# Altium PCB stm32 light weight1-22cm-P1.PcbDoc
Units mm, origin at the board's own origin, x right, y up, seen from the top; angles counter-clockwise.
Board outline 215 x 206.27 mm, 2 copper layers (Top Layer, Bottom Layer); 123 components, 92 nets, 493 pads, 5 vias.
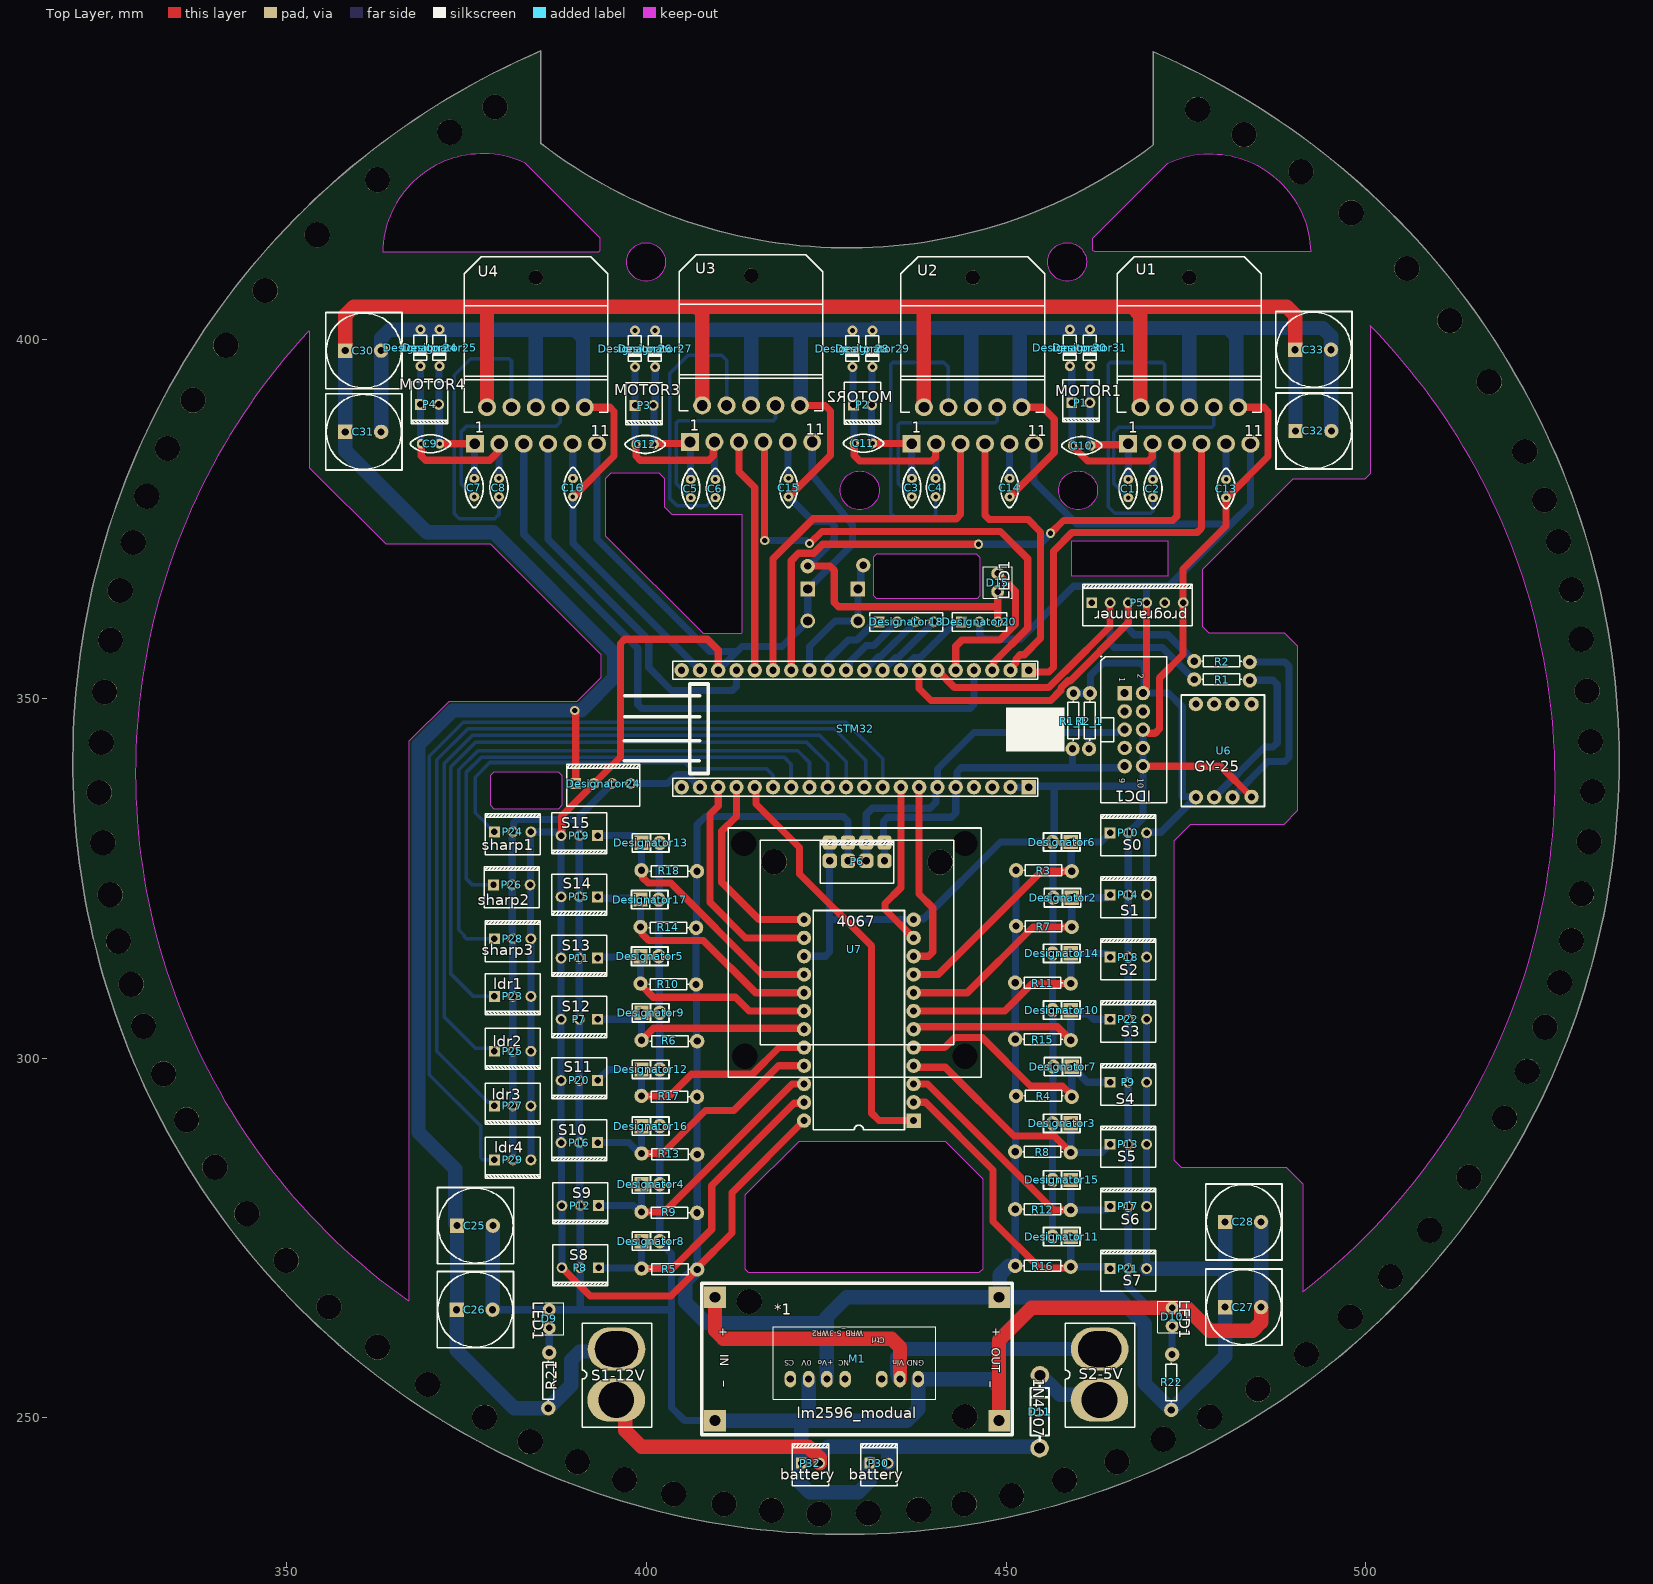
[diagram p0: Top Layer view]
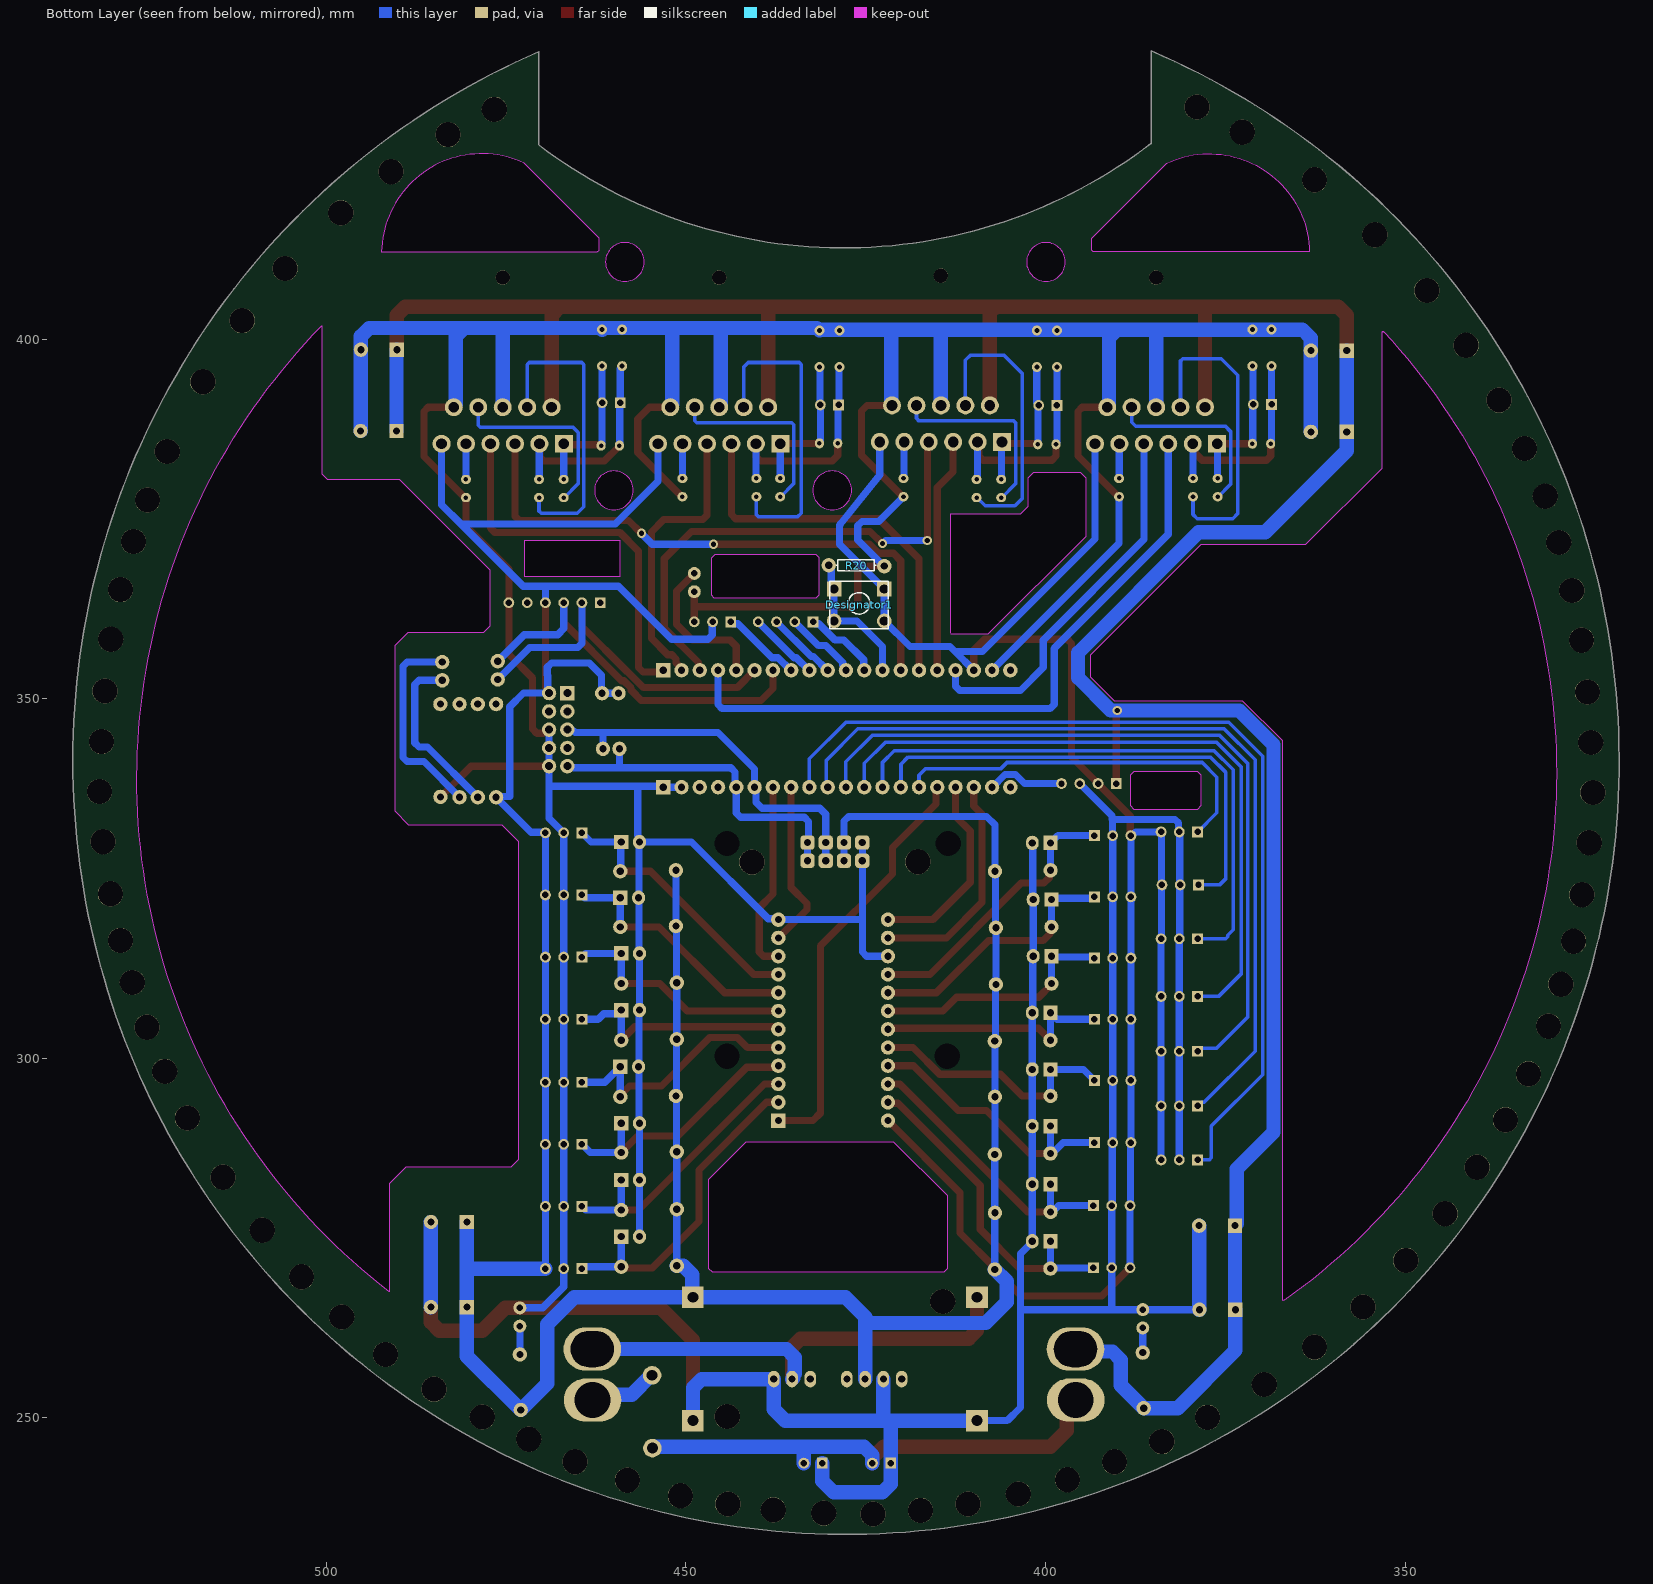
[diagram p1: Bottom Layer view, seen from below]

## Layer stack, top to bottom
Top Solder: solder mask 0.0102, Solder Resist, Dk 3.5
Top Layer: signal copper 0.0356
Dielectric 1: dielectric 0.32, FR-4, Dk 4.8
Bottom Layer: signal copper 0.0356
Bottom Solder: solder mask 0.0102, Solder Resist, Dk 3.5

## Board outline
385.292,440.075 ccw(c427.727,341.305) 470.451,439.951 470.42,439.92 470.42,426.99 470.438,426.99 cw(c428.02,482.674) 385.292,427.228
cut-out: 473.329,285.877 474.345,284.861 488.95,284.861 491.236,282.575 491.236,267.589 491.24,267.568 ccw(c436.32,338.869) 500.634,401.828 500.634,381.254 499.872,380.492 489.839,380.492 477.266,367.919 477.266,360.045 478.155,359.156 488.696,359.156 490.474,357.378 490.474,334.391 488.569,332.486 475.615,332.486 473.329,330.2
cut-out: 459.994,376.268 cw(c459.994,378.968) 457.294,378.968 cw(c459.994,378.968) 459.994,381.668 cw(c459.994,378.968) 462.694,378.968 cw(c459.994,378.968)
cut-out: 429.641,376.268 cw(c429.641,378.968) 426.941,378.968 cw(c429.641,378.968) 429.641,381.668 cw(c429.641,378.968) 432.341,378.968 cw(c429.641,378.968)
cut-out: 458.47,408.018 cw(c458.47,410.718) 455.77,410.718 cw(c458.47,410.718) 458.47,413.418 cw(c458.47,410.718) 461.17,410.718 cw(c458.47,410.718)
cut-out: 399.923,408.018 cw(c399.923,410.718) 397.223,410.718 cw(c399.923,410.718) 399.923,413.418 cw(c399.923,410.718) 402.623,410.718 cw(c399.923,410.718)
cut-out: 363.781,371.475 353.187,382.069 353.187,400.939 ccw(c353.06,400.939) 352.967,401.026 ccw(c419.062,339.752) 366.787,266.334 366.907,266.319 ccw(c366.903,266.446) 367.03,266.446 367.03,344.117 372.544,349.631 390.271,349.631 390.361,349.668 393.663,352.97 393.7,353.06 393.7,356.108 378.333,371.475
cut-out: 462.026,412.369 462.026,414.02 472.485,424.479 cw(c478.35,411.8) 492.316,412.136 492.316,412.115 462.28,412.115
cut-out: 363.283,412.136 393.319,412.115 393.573,412.369 393.573,414.02 383.114,424.479 ccw(c377.249,411.8)
cut-out: 431.546,364.363 431.927,363.982 446.024,363.982 446.405,364.363 446.405,369.57 445.897,370.078 431.927,370.078 431.546,369.697
cut-out: 394.335,372.618 394.335,380.619 395.097,381.381 401.701,381.381 402.463,380.619 402.463,376.682 403.479,375.666 413.258,375.666 413.258,359.156 413.131,359.029 407.924,359.029
cut-out: 459.105,367.03 459.105,371.983 472.44,371.983 472.44,367.03
cut-out: 378.333,335.153 378.333,339.344 378.841,339.852 387.731,339.852 388.239,339.344 388.239,335.153 387.731,334.645 378.841,334.645
cut-out: 413.639,270.764 414.147,270.256 446.278,270.256 446.786,270.764 446.786,283.21 441.579,288.417 421.132,288.417 413.639,280.924

## Design rules (kind name [scope] priority, off if disabled: settings)
Clearance [All] p1: gap=0.254 ignorepadtopadclearanceinfootprint=FALSE except(0: Arc-Hole Track-Hole SMDPad-Hole THPad-Hole Via-Hole Fill-Hole Poly-Hole Region-Hole Text-Hole)
PolygonConnect [All] p1: connectstyle=Relief reliefconductorwidth=0.254 reliefentries=4 polygonreliefangle="90 Angle" airgapwidth=0.254
RoutingVias [All] p1: holewidth=0.711 width=1.27 viastyle="Through Hole" minholewidth=0.711 minwidth=1.27 maxholewidth=0.711 maxwidth=1.27
SolderMaskExpansion [All] p1: expansion=0.102 istentingtop=FALSE
Width [All] p1: maxlimit=2 minlimit=0.5 preferedwidth=1
30 further rules are at their usual default settings.

## Classes and differential pairs
component class "stm32 light weight": *1 C1 C2 C3 C4 C5 C6 C7 C8 C25 C26 C27 C28 D11 IDC1 M1 P1 P2 P3 P4 P5 P7 P8 P9 P10 P11 P12 P13 P14 P15 P16 P17 P18 P19 P20 P21 P22 P23 P24 P25 P26 P27 P28 P30 R1 R2 R3 R4 R5 R6 R7 R8 R9 R10 R11 R12 R13 R14 R15 R16 R17 R18 S1-12V S2-5V U2 U6 U7

## Components (designator, comment, footprint, x,y, rotation, side; value= is the part's Value field where it differs from the comment)
4067 "Comment" DIP254P1080X508-24 440.944,319.278 r180 top
*1 "WRB_S-3WR2" wrb2405s 452.571,370.631 r180 top
C1 "100nF" Cap-100nF#1 460.503,385.373 r270 top
C2 "100nF" Cap-100nF#1 463.932,385.373 r270 top
C3 "100nF" Cap-100nF#1 430.404,385.5 r270 top
C4 "100nF" Cap-100nF#1 433.706,385.5 r270 top
C5 "100nF" Cap-100nF#1 399.67,385.373 r270 top
C6 "100nF" Cap-100nF#1 403.099,385.373 r270 top
C7 "100nF" Cap-100nF#1 369.571,385.5 r270 top
C8 "100nF" Cap-100nF#1 373,385.5 r270 top
C9 "100nF" Cap-100nF#2 363.8,391.921 r0 top
C10 "100nF" Cap-100nF#2 454.351,391.667 r0 top
C11 "100nF" Cap-100nF#2 423.998,391.984 r0 top
C12 "100nF" Cap-100nF#2 393.645,391.836 r0 top
C13 "100nF" Cap-100nF#1 487.044,373.071 r90 top
C14 "100nF" Cap-100nF#1 456.945,373.198 r90 top
C15 "100nF" Cap-100nF#1 426.211,373.198 r90 top
C16 "100nF" Cap-100nF#1 396.239,373.198 r90 top
C25 "10uF" "Cap electrolitic radial 10x16-5" 368.557,271.28 r0 top
C26 "10uF" "Cap electrolitic radial 10x16-5" 368.51,259.596 r0 top
C27 "10uF" "Cap electrolitic radial 10x16-5" 475.364,259.951 r0 top
C28 "10uF" "Cap electrolitic radial 10x16-5" 475.364,271.788 r0 top
C30 "10uF" "Cap electrolitic radial 10x16-5" 353.016,392.946 r0 top
C31 "10uF" "Cap electrolitic radial 10x16-5" 353.016,381.643 r0 top
C32 "10uF" "Cap electrolitic radial 10x16-5" 485.143,381.77 r0 top
C33 "10uF" "Cap electrolitic radial 10x16-5" 485.096,393.073 r0 top
D9 "LED1" led-2 386.334,263.779 r180 top
D10 "LED1" led-2 472.948,264.033 r180 top
D11 "1N4007" Diod1n4007 454.66,250.952 r90 top
D15 "LED1" led-2 448.945,366.141 r0 top (schematic designator D13)
Designator1 "Comment" "Switch - Push to On" 425.894,363.029 r180 bottom
Designator2 "Comment" "Cap electrolitic radial 5x11-2" 453.612,319.659 r0 top
Designator3 "Comment" "Cap electrolitic radial 5x11-2" 453.485,288.29 r0 top
Designator4 "Comment" "Cap electrolitic radial 5x11-2" 404.782,285.162 r180 top
Designator5 "Comment" "Cap electrolitic radial 5x11-2" 404.654,316.861 r180 top
Designator6 "Comment" "Cap electrolitic radial 5x11-2" 453.485,327.406 r0 top
Designator7 "Comment" "Cap electrolitic radial 5x11-2" 453.612,296.164 r0 top
Designator8 "Comment" "Cap electrolitic radial 5x11-2" 404.781,277.237 r180 top
Designator9 "Comment" "Cap electrolitic radial 5x11-2" 404.781,308.991 r180 top
Designator10 "Comment" "Cap electrolitic radial 5x11-2" 453.485,304.034 r0 top
Designator11 "Comment" "Cap electrolitic radial 5x11-2" 453.485,272.538 r0 top
Designator12 "Comment" "Cap electrolitic radial 5x11-2" 404.781,301.113 r180 top
Designator13 "Comment" "Cap electrolitic radial 5x11-2" 404.781,332.613 r180 top
Designator14 "Comment" "Cap electrolitic radial 5x11-2" 453.485,311.912 r0 top
Designator15 "Comment" "Cap electrolitic radial 5x11-2" 453.485,280.416 r0 top
Designator16 "Comment" "Cap electrolitic radial 5x11-2" 404.781,293.239 r180 top
Designator17 "Comment" "Cap electrolitic radial 5x11-2" 404.654,324.739 r180 top
Designator18 "Comment" HDR1X4 432.308,360.68 r0 top
Designator20 "Comment" HDR1X3#1 443.738,360.68 r0 top
Designator24 "Comment" HDR1X4 390.144,338.201 r0 top
Designator24 "Comment" "Diode 1n4148" 368.554,401.32 r270 top
Designator25 "Comment" "Diode 1n4148" 371.221,401.32 r270 top
Designator26 "Comment" "Diode 1n4148" 398.399,401.193 r270 top
Designator27 "Comment" "Diode 1n4148" 401.193,401.193 r270 top
Designator28 "Comment" "Diode 1n4148" 428.625,401.193 r270 top
Designator29 "Comment" "Diode 1n4148" 431.419,401.193 r270 top
Designator30 "Comment" "Diode 1n4148" 458.851,401.32 r270 top
Designator31 "Comment" "Diode 1n4148" 461.645,401.32 r270 top
IDC1 "CONNECTOR_IDC_5X2" "IDC2.54-10PIN WITH CABLE" 467.741,345.694 r270 top
M1 "lm2596_modual" LM2596_modual 389.382,134.62 r0 top
P1 "MOTOR1" HDR1X2 459.105,391.16 r0 top
P2 "MOTOR2" HDR1X2 428.752,390.842 r0 top
P3 "MOTOR3" HDR1X2 398.399,390.779 r0 top
P4 "MOTOR4" HDR1X2 368.554,390.906 r0 top
P5 "programmer" HDR1X6 461.899,363.347 r0 top
P6 "OLED" OLED 516.636,295.021 r0 top
P7 "S12" HDR1X3#2 393.192,305.435 r180 top
P8 "S8" HDR1X3#2 393.319,270.891 r180 top
P9 "S4" HDR1X3#2 464.438,296.662 r0 top
P10 "S0" HDR1X3#2 464.438,331.333 r0 top
P11 "S13" HDR1X3#2 393.192,313.944 r180 top
P12 "S9" HDR1X3#2 393.319,279.527 r180 top
P13 "S5" HDR1X3#2 464.438,288.026 r0 top
P14 "S1" HDR1X3#2 464.438,322.697 r0 top
P15 "S14" HDR1X3#2 393.192,322.453 r180 top
P16 "S10" HDR1X3#2 393.192,288.29 r180 top
P17 "S6" HDR1X3#2 464.438,279.39 r0 top
P18 "S2" HDR1X3#2 464.438,314.061 r0 top
P19 "S15" HDR1X3#2 393.193,330.972 r180 top
P20 "S11" HDR1X3#2 393.192,296.926 r180 top
P21 "S7" HDR1X3#2 464.438,270.754 r0 top
P22 "S3" HDR1X3#2 464.438,305.425 r0 top
P23 "ldr1" HDR1X3#3 378.841,308.61 r0 top
P24 "sharp1" HDR1X3#2 378.84,331.46 r0 top
P25 "ldr2" HDR1X3#3 378.84,301 r0 top
P26 "sharp2" HDR1X3#2 378.713,324.094 r0 top
P27 "ldr3" HDR1X3#3 378.84,293.38 r0 top
P28 "sharp3" HDR1X3#2 378.84,316.601 r0 top
P29 "ldr4" HDR1X3#3 378.841,285.877 r0 top
P30 "battery" HDR1X2 431.038,243.713 r0 top
P32 "battery" HDR1X2 421.513,243.713 r0 top
R1 "Resistor" resistor 480.06,352.679 r0 top
R1_1 "Resistor" resistor 459.359,346.837 r270 top (schematic designator R1)
R2 "Resistor" resistor 480.06,355.219 r0 top
R2_1 "Resistor" resistor 461.645,346.837 r270 top (schematic designator R2)
R3 "Resistor" resistor 455.295,326.136 r0 top
R4 "Resistor" resistor 455.295,294.767 r0 top
R5 "Resistor" resistor 403.119,270.633 r180 top
R6 "Resistor" resistor 403.119,302.383 r180 top
R7 "Resistor" resistor 455.295,318.389 r0 top
R8 "Resistor" resistor 455.168,287.02 r0 top
R9 "Resistor" resistor 403.098,278.511 r180 top
R10 "Resistor" resistor 402.971,310.261 r180 top
R11 "Resistor" resistor 455.168,310.515 r0 top
R12 "Resistor" resistor 455.168,279.019 r0 top
R13 "Resistor" resistor 403.119,286.635 r180 top
R14 "Resistor" resistor 402.971,318.135 r180 top
R15 "Resistor" resistor 455.168,302.641 r0 top
R16 "Resistor" resistor 455.168,271.145 r0 top
R17 "Resistor" resistor 403.098,294.64 r180 top
R18 "Resistor" resistor 403.098,326.009 r180 top
R20 "Resistor" resistor 426.212,368.554 r180 bottom
R21 "Resistor" resistor 386.334,255.27 r90 top
R22 "Resistor" resistor 472.948,255.016 r90 top
S1-12V "SWITCH SPDT2PIN" "Switch SPDT2PIN" 395.605,256.032 r0 top
S2-5V "SWITCH SPDT2PIN" "Switch SPDT2PIN" 462.788,256.032 r0 top
STM32 "Comment" STM32 429.057,345.583 r0 top
U1 "L6203" Multiwatt11 475.459,387.985 r0 top
U2 "L6203" Multiwatt11 445.36,387.985 r0 top
U3 "L6203" Multiwatt11 414.528,388.239 r0 top (schematic designator U2)
U4 "L6203" Multiwatt11 384.614,387.985 r0 top
U6 "GY-25" GY-25 480.187,342.773 r90 top
U7 "OLED-BIG" OLED-BIG 428.879,314.96 r0 top

## Footprints (in the part's own frame and the unit in brackets; to place one, negate y for a bottom-side part, rotate by r counter-clockwise, add the part's x,y. Pads: shape width x height; smd on the part's side, far side on the other; paste and mask are expansions set on the pad)
"Cap electrolitic radial 5x11-2" [mm]
  rect 2x2 hole 1: 1(5.493,2.667)
  oval 1.8x2 hole 1: 2(2.953,2.667)
  silkscreen extent 1.68,1.4 6.76,3.94, body extent 1.82,0.04 6.82,5.04, height 11.3
"Cap electrolitic radial 10x16-5" [mm]
  rect 2x2 hole 1: 1(5.077,5.453)
  round 2 hole 1: 2(10.077,5.453)
  silkscreen extent 2.38,0.15 12.98,10.75, body extent 2.58,0.46 12.58,10.45, height 16
Cap-100nF#1 [mil]
  oval 50x55 hole 25: 1(192.17,254.96) 2(292.17,254.96)
  silkscreen extent 133,206 352,304, body extent 127,221 357,288, height 272
Cap-100nF#2 [mil]
  oval 50x55 hole 25: 1(192.17,-254.96) 2(292.17,-254.96)
  silkscreen extent 133,-304 352,-206, body extent 127,-288 357,-221, height 272
Diod1n4007 [mm]
  round 2.575 hole 1.5: 1(4.97,-0.03)
  round 2.575 hole 1.52: 2(-5.16,0.01)
  silkscreen extent -4.17,-1.28 3.96,1.26, body extent -5.86,-2.32 5.74,2.33, height 1.59
"Diode 1n4148" [mil]
  round 55 hole 27: 1(0,0) 2(200,0)
  silkscreen extent 30,-36 168,34, body extent -7,-32 210,33, height 71
DIP254P1080X508-24 [mm]
  round 2 hole 1: 97(19.05,22.86) 98(19.05,25.4) 99(3.81,25.4) 100(3.81,22.86) 101(3.81,20.32) 102(3.81,17.78) 103(3.81,15.24) 104(3.81,12.7) 105(3.81,10.16) 106(19.05,7.62) 107(19.05,10.16) 108(19.05,12.7) 109(19.05,15.24) 110(19.05,17.78) 111(19.05,20.32) 112(3.81,7.62) 113(3.81,0) 114(19.05,27.94) 115(19.05,5.08) 116(3.81,5.08) 118(3.81,2.54) 119(19.05,2.54) 120(19.05,0)
  rect 2x2 hole 1: 117(3.81,27.94)
  silkscreen extent 5.08,-1.27 17.78,29.21, body extent 3.68,-1.9 19.18,29.84, height 5.08
GY-25 [mm]
  round 2 hole 1: 1(-6.477,3.81) 2(-6.477,1.27) 3(-6.477,-1.27) 4(-6.43,-3.93) 5(6.477,3.81) 6(6.477,1.27) 7(6.477,-1.27) 8(6.477,-3.937)
  silkscreen extent -7.75,-5.72 7.75,5.84, body extent -7.75,-5.92 7.76,5.67, height 1.76
HDR1X2 [mm] "Connector; Header; 2 Position"
  rect 1.5x1.5 hole 0.9: 1(0,0)
  round 1.5 hole 0.9: 2(2.54,0)
  silkscreen extent -1.27,-2.67 3.81,3.17, body extent -1.27,-3.2 3.81,2.6, height 11.51
HDR1X3#1 [mm] "Connector; Header; 3 Position"
  rect 1.5x1.5 hole 0.9: 1(0,0)
  round 1.5 hole 0.9: 2(2.54,0) 3(5.08,0)
  silkscreen extent -1.27,-1.27 6.35,1.27, body extent -1.26,-1.27 6.36,1.27, height 8.38
HDR1X3#2 [mm] "Connector; Header; 3 Position"
  rect 1.5x1.5 hole 0.9: 1(0.001,0.01)
  round 1.5 hole 0.9: 2(2.541,0.01) 3(5.081,0.01)
  silkscreen extent -1.27,-3.17 6.35,2.55, body extent -1.27,-3.19 6.35,2.61, height 11.51
HDR1X3#3 [mm] "Connector; Header; 3 Position"
  rect 1.5x1.5 hole 0.9: 1(0.001,-0.01)
  round 1.5 hole 0.9: 2(2.541,-0.01) 3(5.081,-0.01)
  silkscreen extent -1.27,-2.55 6.35,3.17, body extent -1.27,-2.61 6.35,3.19, height 11.51
HDR1X4 [mm] "Connector; Header; 4 Position"
  rect 1.5x1.5 hole 0.9: 1(0,0)
  round 1.5 hole 0.9: 2(2.54,0) 3(5.08,0) 4(7.62,0)
  silkscreen extent -1.27,-1.27 8.89,1.27, body extent -1.27,-1.28 8.89,1.26, height 8.38
HDR1X6 [mm] "Connector; Header; 6 Position"
  rect 1.5x1.5 hole 0.9: 1(0,0)
  round 1.5 hole 0.9: 2(2.54,0) 3(5.08,0) 4(7.62,0) 5(10.16,0) 6(12.7,0)
  silkscreen extent -1.27,-3.17 13.97,2.54, body extent -1.27,-3.2 13.97,2.6, height 11.51
"IDC2.54-10PIN WITH CABLE" [mm] "Connector; IDC, Low Profile Male Header, Thru-Hole; 10 Position; Vertical; Pitch 2.54 mm; 20.32 x 9.2 x 9.45 mm (LxWxH) DESIGNER : ABBAS BASEREH"
  rect 2x2 hole 1.1: 1(-5.08,-1.27)
  round 2 hole 1.1: 2(-5.08,1.27) 3(-2.54,-1.27) 4(-2.54,1.27) 5(0,-1.27) 6(0,1.27) 7(2.54,-1.27) 8(2.54,1.27) 9(5.08,-1.27) 10(5.08,1.27)
  silkscreen extent -10.16,-4.6 10.16,4.6, body extent -10.15,-4.6 10.17,5.22, height 133.79
led-2 [mm]
  round 1.8 hole 0.9: 1(-0.127,1.27) 2(-0.127,-1.27)
  silkscreen extent -2.13,-2.2 1.91,2.2, body extent -2.03,-1.99 1.46,1.99, height 5.38
LM2596_modual [mm]
  round 3.5 hole 3.5: 0(24.892,131.572) 0(54.864,115.57)
  rect 3x3 hole 1.5: 1(20.13,132.143) 2(20.13,114.998) 3(59.626,114.998) 4(59.626,132.143)
  silkscreen extent 18.29,113.03 61.47,134.11, body extent 18.14,113.07 61.64,134.07, height 15.41
Multiwatt11 [mm] "TO, Thru-Hole, Vertical, Heatsink Mounted; 11 Bent Staggered Leads; Pitch 1.7 mm"
  round 2 hole 2: 0(0,20.574)
  rect 2.5x2.5 hole 1.5: 1(-8.5,-2.54)
  round 2.5 hole 1.5: 2(-6.8,2.54) 3(-5.1,-2.54) 4(-3.4,2.54) 5(-1.7,-2.54) 6(0,2.54) 7(1.7,-2.54) 8(3.4,2.54) 9(5.1,-2.54) 10(6.8,2.54) 11(8.5,-2.54)
  silkscreen extent -10,1.83 10,23.49, body extent -10.1,-2.8 10.1,7.09, height 21.8
OLED [mm]
  rect 1.5x1.5 hole 0.9: 1(-91.186,32.512)
  round 1.5 hole 0.9: 2(-88.646,32.512) 3(-86.106,32.512) 4(-83.566,32.512)
  round 3.5 hole 3.5: 9(-98.9,32.3) 9(-75.819,32.258)
  silkscreen extent -100.83,6.84 -73.92,35.31, body extent -100.73,6.94 -74.03,34.8, height 1.47
OLED-BIG [mm]
  rrect50% 2x2 hole 1: 1(-3.42,12.5) 1(-3.42,15.04) 1(-3.42,15.04) 2(-0.88,12.5) 2(-0.88,15.04) 2(-0.88,15.04) 3(1.66,12.5) 3(1.66,15.04) 3(1.66,15.04) 4(4.2,12.5) 4(4.2,15.04) 4(4.2,15.04)
  round 1.524 hole 3.5: 139(15.376,14.913) 140(-15.358,14.913) 141(-15.231,-14.678) 142(15.376,-14.678)
  silkscreen extent -17.52,-17.6 17.66,17.07, body extent -17.61,-17.69 18.39,16.31, height 9.6
resistor [mm]
  round 2 hole 1: 1(-3.916,-0.004) 2(3.81,-0.127)
  silkscreen extent -2.87,-0.77 2.66,0.76, body extent -4.18,-1.02 3.92,0.98, height 0.99
STM32 [mm]
  round 2 hole 1: 1(-24.181,-7.89) 2(-21.641,-7.89) 3(-19.101,-7.89) 3.3V(-24.181,8.366) 3.3V(18.999,-7.89) 4(-16.561,-7.89) 5V(-19.101,8.366) 7(16.459,-7.89) 10(-14.021,-7.89) 11(-11.481,-7.89) 12(-8.941,-7.89) 13(-6.401,-7.89) 14(-3.861,-7.89) 15(-1.321,-7.89) 16(1.219,-7.89) 17(3.759,-7.89) 18(6.299,-7.89) 19(8.839,-7.89) 21(11.379,-7.89) 22(13.919,-7.89) 26(21.539,8.366) 27(18.999,8.366) 28(16.459,8.366) 29(13.919,8.366) 30(11.379,8.366) 31(8.839,8.366) 32(6.299,8.366) 33(3.759,8.366) 38(1.219,8.366) 39(-1.321,8.366) 40(-3.861,8.366) 41(-6.401,8.366) 42(-8.941,8.366) 43(-11.481,8.366) 45(-14.021,8.366) 46(-16.561,8.366) GND(-21.641,8.366) GND(21.539,-7.89)
  rect 2x2 hole 1: 25(24.079,8.366) GND(24.079,-7.89)
  silkscreen extent -25.45,-9.16 25.35,9.64, body extent -29.44,-11.12 28.98,11.74, height 9
"Switch - Push to On" [mil]
  rect 80x80 hole 50: 1(-137.5,87.5) 1(137.5,87.5)
  round 80 hole 50: 2(-137.5,-87.5) 2(137.5,-87.5)
  silkscreen extent -160,-130 160,130, body extent -155,-121 157,123, height 205
"Switch SPDT2PIN" [mm]
  oval 8x6 hole 5 slot 6 at 0 deg: 1(0.214,3.544)
  oval 8x6 hole 5: 3(0.18,-3.56)
  silkscreen extent -4.55,-7.37 5.08,7.11, body extent -3.3,-6.48 3.56,6.22, height 28.62
wrb2405s [mm]
  oval 1.6x2.3 hole 1: 1(14.802,115.234) 2(17.342,115.234) 3(19.882,115.234) 5(24.962,115.234) 6(27.502,115.234) 7(30.042,115.234) 8(32.582,115.234)
  silkscreen extent 12.39,107.93 34.99,118.03, body extent 12.62,108.15 34.62,117.65, height 12

## Part data
C1 C2 C3 C4 C5 C6 C7 C8: library part Cap-100nF, "Cap-100nF"
C9 C10 C11 C12 C13 C14 C15 C16: library part "Cap electrolitic radial 6x7-2.5", "Cap electrolitic radial 6x7-2.5"
C25 C26 C27 C28 C30 C31 C32 C33: library part "Cap electrolitic radial 10x16-5", "Cap electrolitic radial 10x16-5"
D9 D10 D15: "Typical RED GaAs LED", LatestRevisionDate=08-Jul-2005, LatestRevisionNote="Mech Layer 1 removed.", PackageReference=LED-1, Published=8-Jun-2000, Publisher="Altium Limited"
D11: library part "Diode 1N4007", "1 Amp General Purpose Rectifier", PackageDocument=Aug-1999, Code_JEDEC=DO-204-AL, ComponentLink1Description="Manufacturer Link", ComponentLink1URL=http://www.fairchildsemi.com/, ComponentLink2Description=Datasheet, ComponentLink2URL=http://www.fairchildsemi.com/ds/1N%2F1N4001.pdf, DatasheetDocument=1998, LatestRevisionDate=17-Jul-2002, LatestRevisionNote="Re-released for DXP Platform.", PackageReference=DO-41, Published=8-Jun-2000, Publisher="Altium Limited"
IDC1: library part "IDC 5X2", "IDC, 5-Pin, Dual row", Manufacturer=CHINA, Max Current=mA, Category=Connector, ComponentLink1Description=Datasheet, ComponentLink2Description=Reference, Connector type="IDC5X2  PROGPIN", designer="ABBAS BASEREH", LatestRevisionDate=1395-11-17, Mounting Technology=Through-Hole, Pin Count=10, Publisher="ABBAS BASEREH", Status=Unreleased, Update=2017-2-4
P1 P2 P3 P4 P30 P32: library part "Header 2", "Header, 2-Pin", LatestRevisionDate=17-Jul-2002, LatestRevisionNote="Re-released for DXP Platform.", Publisher="Altium Limited"
P5: library part "Header 6", "Header, 6-Pin", LatestRevisionDate=17-Jul-2002, LatestRevisionNote="Re-released for DXP Platform.", Publisher="Altium Limited"
P6: library part "MO-Header 4"
P7 P8 P9 P10 P11 P12 P13 P14 P15 P16 P17 P18 P19 P20 P21 P22 P23 P24 P25 P26 P27 P28 P29: library part "Header 3", "Header, 3-Pin", LatestRevisionDate=17-Jul-2002, LatestRevisionNote="Re-released for DXP Platform.", Publisher="Altium Limited"
U1 U2 U3 U4: "DMOS Full Bridge Driver", ComponentLink1Description="Manufacturer Link", ComponentLink1URL=http://www.st.com/, ComponentLink2Description=Datasheet, ComponentLink2URL=http://www.st.com/stonline/products/literature/ds/1373/l6201.pdf, DatasheetVersion=Jul-1997, LatestRevisionDate=17-Jul-2002, LatestRevisionNote="Re-released for DXP Platform.", Note="TAB connected to pin 6", PackageDescription="TO, Thru-Hole, Vertical, Heatsink Mounted; 11 Bent Staggered Leads; Pitch 1.7 mm", PackageReference=Multiwatt11, Published=8-Jun-2000, Publisher="Altium Limited"
U6: "Gyroscope"
M1: طراحی توسط="مهندس محمد رفیعی", وب سایت=www.Pishnam.com, کانال تلگرام=@Pishnam
R1 R1_1 R2 R2_1 R3 R4 R5 R6 R7 R8 R9 R10 R11 R12 R13 R14 R15 R16 R17 R18 R20 R21 R22: SimulationGenericComponent=True, TC1=0, TC2=0

## Free pads (board coordinates)
  round 3.5 hole 3.5: 6(323.886,336.965) 6(324.179,343.907) 6(324.394,329.98) 6(324.648,350.935) 6(325.41,322.741) 6(325.449,358.131) 6(326.553,316.264) 6(326.807,365.032) 6(328.331,310.295) 6(328.624,371.72) 6(330.043,304.465) 6(330.496,378.142) 6(332.846,297.832) 6(333.378,384.784) 6(336.045,291.439) 6(336.934,391.515) 6(339.979,284.861) 6(341.506,399.135) 6(344.424,278.384) 6(346.967,406.755) 6(349.885,271.907) 6(354.206,414.502) 6(355.854,265.43) 6(362.585,259.842) 6(362.585,422.148) 6(369.57,254.635) 6(372.626,428.766) 6(377.463,250.077) 6(378.926,432.266) 6(383.816,246.702) 6(390.394,243.892) 6(396.944,241.401) 6(403.769,239.429) 6(410.754,238.032) 6(417.358,237.143) 6(423.962,236.635) 6(430.82,236.762) 6(437.838,237.21) 6(444.155,238.032) 6(450.759,239.175) 6(458.125,241.334) 6(465.396,243.896) 6(471.836,247.036) 6(476.626,431.936) 6(478.295,250.131) 6(483.066,428.426) 6(485.013,254) 6(490.985,423.265) 6(491.744,258.826) 6(497.84,264.033) 6(497.97,417.55) 6(503.428,269.621) 6(505.717,409.803) 6(508.889,276.098) 6(511.686,402.564) 6(514.35,283.464) 6(517.147,394.055) 6(519.306,291.693) 6(522.11,384.37) 6(522.456,298.182) 6(524.858,377.614) 6(524.927,304.326) 6(526.793,371.847) 6(526.959,310.549) 6(528.61,316.391) 6(528.61,365.159) 6(529.968,358.258) 6(530.007,322.868) 6(530.769,351.062) 6(531.023,330.107) 6(531.238,344.034) 6(531.531,337.092)

## Via types
v1: diameter 1.27, hole 0.711, Top Layer to Bottom Layer, 5 vias

## Nets (pads, with @x,y where several pads share a name; then routed paths per layer and width w, separated by ;. In a path a pad name is that pad's centre, name@x,y a point inside that pad or via, vN(x,y) a via of type N, cw(c..) or ccw(c..) an arc to the next point about the centre after c; other vN are vias at no path point)
3.3v: 
9.U1: C13.2 U1.9 | length 5
  Bottom Layer w1: U1.9 480.563,385.441 480.563,380.497 C13.2
9.U2: C14.2 U2.9 | length 4.8
  Bottom Layer w1: U2.9 450.464,385.441 450.464,380.624 C14.2
9.U3: C15.2 U3.9 | length 5.1
  Bottom Layer w1: U3.9 419.682,385.646 419.682,380.672 C15.2
9.U4: C16.2 U4.9 | length 4.8
  Bottom Layer w1: U4.9 389.739,385.42 389.739,380.643 C16.2
A: 4067.116 STM32.19 | length 26.6
  Top Layer w1: 4067.116 439.215,314.198 439.801,314.784 439.801,320.929 437.896,322.834 STM32.19
ADC0: 4067.117 STM32.10 | length 58.3
  Top Layer w1: STM32.10 415.227,337.502 415.227,335.343 421.259,329.311 421.259,325.628 431.292,315.595 431.292,292.354 432.308,291.338 4067.117
B: 4067.118 STM32.18 | length 23.5
  Top Layer w1: STM32.18 435.356,323.723 433.167,321.534 433.167,320.705 4067.118
C: 4067.119 STM32.3 | length 31.6
  Top Layer w1: STM32.3 409.956,335.079 408.813,333.936 408.813,321.691 413.766,316.738 4067.119
D: 4067.120 STM32.4 | length 27.6
  Top Layer w1: STM32.4 412.496,333.629 410.464,331.597 410.464,324.485 415.671,319.278 4067.120
GND: 4067.113 4067.115 *1.1 *1.7 C13.1 C14.1 C15.1 C16.1 C25.2 C26.2 C27.2 C28.2 C30.2 C31.2 C32.2 C33.2 D9.2 D10.2 D15.2 Designator2.2 Designator3.2 Designator4.2 Designator5.2 Designator6.2 Designator7.2 Designator8.2 Designator9.2 Designator10.2 Designator11.2 Designator12.2 Designator13.2 Designator14.2 Designator15.2 Designator16.2 Designator17.2 Designator20.3 Designator24.1@368.554,401.32 Designator24.3 Designator25.1 Designator26.1 Designator27.1 Designator28.1 Designator29.1 Designator30.1 Designator31.1 IDC1.6 IDC1.8 IDC1.10 M1.2 M1.3 P5.6 P6.1 P7.2 P8.2 P9.2 P10.2 P11.2 P12.2 P13.2 P14.2 P15.2 P16.2 P17.2 P18.2 P19.2 P20.2 P21.2 P22.2 P23.2 P24.2 P25.2 P26.2 P27.2 P28.2 P29.2 P30.1 P32.1 R20.2 STM32.GND U1.6 U1.10 U2.6 U2.10 U3.6 U3.10 U4.6 U4.10 U6.4 U7.1 | length 1077.9
  Top Layer w1: C16.1 389.827,378.079 395.478,383.731 395.478,389.939 394.892,390.525 U4.10 ; C15.1 419.798,378.079 425.577,383.857 425.577,390.017 424.815,390.779 U3.10 ; R20.2 425.499,368.427 426.085,367.841 426.085,363.361 426.671,362.775 448.818,362.775 ; Designator20.3 448.818,362.775 ; D15.2 448.818,362.775 ; C14.1 450.532,378.079 456.692,384.238 456.692,388.874 455.041,390.525 U2.10 ; IDC1.10 479.846,340.614 U6.4 ; IDC1.6 469.282,345.694 469.79,345.186 470.711,345.186 471.297,345.772 471.297,352.849 474.599,356.151 P5.6 474.599,368.046 480.568,374.015 C13.1 480.695,377.952 486.41,383.667 486.41,389.939 485.824,390.525 U1.10
  Top Layer w2: M1.3 449.008,260.794 453.517,265.303 D10.2 475.107,265.303 478.282,262.128 484.269,262.128 485.441,263.3 C27.2
  Bottom Layer w1: C26.2 D9.2 391.033,265.049 ; P29.2 P27.2 P25.2 P23.2 ; P23.2 P28.2 381.317,316.674 381.317,324.041 P26.2 381.317,324.167 381.317,331.406 P24.2 381.477,331.566 381.477,332.722 381.967,333.212 390.743,333.212 390.743,333.72 Designator24.3 ; C16.1 389.763,371.602 STM32.GND@407.416,353.949 ; P15.2 P11.2 P7.2 P20.2 P16.2 390.714,288.217 390.714,279.581 P12.2 P8.2 390.778,265.304 391.033,265.049 ; P15.2 P19.2 390.652,333.212 ; Designator4.2 401.828,274.57 402.089,274.309 402.089,274.209 403.479,272.819 403.479,265.049 ; Designator4.2@401.828,282.495 Designator16.2 ; Designator16.2 Designator12.2 Designator9.2 401.764,306.388 401.764,314.13 Designator5.2 Designator17.2 401.764,322.135 401.764,329.882 Designator13.2 ; M1.2 405.32,249.618 403.479,251.46 403.479,265.049 ; C15.1 423.164,374.65 425.499,374.65 426.085,374.064 426.085,372.061 422.451,368.427 R20.2 ; 4067.115 424.864,314.198 425.45,314.784 425.45,319.278 ; U7.1@425.459,330 425.455,329.996 425.455,327.538 P6.1 425.45,319.278 ; STM32.GND@450.596,337.693 453.136,337.693 453.263,337.82 456.692,337.82 ; Designator11.2 Designator15.2 Designator3.2 456.501,291.02 456.501,298.767 Designator7.2 456.501,298.895 456.501,306.637 Designator10.2 Designator14.2 456.501,314.642 456.501,322.262 Designator2.2 456.501,322.389 456.501,330.01 Designator6.2 ; IDC1.6 IDC1.8 IDC1.10 469.011,337.82 ; D10.2 469.9,265.303 466.979,268.224 P21.2 P17.2 P13.2 P9.2 P22.2 P18.2 P14.2 P10.2 469.011,333.375 469.011,337.82 ; 391.033,265.049 403.479,265.049 ; 425.45,319.278 4067.113 437.267,319.411 438.537,319.411 449.199,330.073 Designator6.2 ; Designator6.2 456.591,330.226 456.591,330.892 456.692,330.993 456.692,337.82 ; 456.692,337.82 469.011,337.82
  Bottom Layer w2: C31.2 C30.2 363.093,400.148 364.265,401.32 368.554,401.32 Designator25.1 384.556,401.32 ; C26.2 378.587,276.686 C25.2 ; U4.6 384.614,401.262 384.556,401.32 ; U4.10 391.414,390.66 391.16,390.914 391.16,400.148 389.988,401.32 ; M1.2 421.379,249.618 ; U3.6 414.528,401.32 ; U3.10 421.424,390.875 421.424,401.32 ; 421.64,249.618 421.513,249.492 P32.1 421.513,240.811 422.685,239.639 429.449,239.639 431.038,241.228 P30.1 ; *1.7 422.529,249.619 436.181,249.618 437.769,251.206 *1.1 447.802,255.397 449.008,254.19 M1.3 ; Designator29.1 431.771,401.545 445.037,401.545 ; Designator29.1@431.419,401.32 421.424,401.32 ; U2.6 445.264,390.621 445.264,390.974 445.135,391.104 445.135,401.447 445.037,401.545 ; U2.10 452.16,390.66 451.866,390.954 451.866,401.545 ; Designator31.1 461.87,401.545 475.742,401.545 ; Designator31.1@461.645,401.545 451.866,401.545 ; U1.6 475.459,401.262 475.742,401.545 ; U1.10 482.259,390.66 481.965,390.954 481.965,400.373 480.793,401.545 ; C27.2 C28.2 ; C32.2 495.173,387.27 C33.2 495.173,400.373 494.001,401.545 480.793,401.545 ; 384.556,401.32 389.988,401.32 ; 389.988,401.32 421.424,401.32 ; 445.037,401.545 451.866,401.545 ; 475.742,401.545 480.793,401.545
INL1: STM32.28 U4.5 | length 94.8
  Bottom Layer w1: U4.5 382.914,372.863 398.78,356.997 398.78,349.201 399.366,348.615 444.93,348.615 445.516,349.201 STM32.28
INL2: STM32.27 U3.7 | length 70.3
  Top Layer w1: U3.7 416.381,385.546 416.381,372.035 v1(416.433,371.983) ; v1(422.656,371.602) 422.729,371.602 424.38,373.253 449.199,373.253 453.009,369.443 453.009,359.791 448.247,355.029 448.247,354.14 STM32.27
  Bottom Layer w1: v1(416.433,371.983) 422.202,371.983 422.583,371.602 v1(422.656,371.602)
INR1: STM32.25 U1.7 | length 53.6
  Top Layer w1: STM32.25 453.39,353.695 455.935,353.695 456.565,354.325 456.565,370.509 459.182,373.126 476.573,373.126 477.159,373.712 U1.7
INR2: STM32.26 U2.7 | length 39.9
  Top Layer w1: U2.7 447.06,375.49 447.646,374.904 453.058,374.904 454.787,373.175 454.787,358.394 452.501,356.108 451.968,356.108 451.382,355.522 451.382,355.006 450.596,354.22 STM32.26
ldr1: P23.1 STM32.14 | length 94.5
  Bottom Layer w0.5: P23.1 375.93,308.6 372.745,311.785 372.745,340.487 376.174,343.916 422.286,343.916 425.196,341.006 STM32.14
ldr2: P25.1 STM32.15 | length 106.8
  Bottom Layer w0.5: P25.1 378.46,301.371 376.23,301.371 371.856,305.745 371.856,340.995 375.793,344.932 424.053,344.932 427.759,341.226 427.759,337.716 STM32.15
ldr3: P27.1 STM32.16 | length 118.7
  Bottom Layer w0.5: P27.1 378.341,293.87 377.949,293.87 370.84,300.979 370.84,341.503 375.158,345.821 426.085,345.821 430.45,341.456 430.45,337.867 STM32.16
ldr4: P29.1 STM32.17 | length 131.8
  Bottom Layer w0.5: P29.1 377.229,285.867 376.936,286.16 376.936,290.576 369.788,297.724 369.788,341.975 374.523,346.71 427.736,346.71 432.816,341.63 STM32.17
LED1: 
LED2: 
LED3: 
M1.1: C1.1 C10.2 Designator31.2 P1.2 U1.1 | length 21.4
  Top Layer w1: C10.2 461.887,385.306 466.82,385.306 U1.1
  Bottom Layer w1: Designator31.2 P1.2 461.645,385.455 461.772,385.328 C10.2 ; U1.1 466.969,385.435 466.969,380.502 C1.1
M1.2: C2.1 C10.1 Designator30.2 P1.1 U1.3 | length 30.3
  Top Layer w1: C10.1 459.232,385.127 461.327,383.032 469.711,383.032 470.297,383.618 470.297,385.383 U1.3
  Bottom Layer w1: Designator30.2 458.851,396.133 459.105,395.879 P1.1 459.18,391.085 459.18,385.243 C10.1 ; U1.3 470.383,385.42 470.383,380.517 C2.1
M2.1: C3.1 C11.2 Designator29.2 P2.2 U2.1 | length 21
  Top Layer w1: C11.2 431.451,385.477 436.828,385.477 U2.1
  Bottom Layer w1: C11.2 431.419,385.645 431.292,385.772 P2.2 431.356,390.906 431.356,396.049 Designator29.2 ; U2.1 436.87,385.435 436.87,380.629 C3.1
M2.2: C4.1 C11.1 Designator28.2 P2.1 U2.3 | length 31
  Top Layer w1: C11.1 428.879,383.794 429.641,383.032 439.612,383.032 440.198,383.618 440.198,385.383 U2.3
  Bottom Layer w1: Designator28.2 428.688,396.049 428.688,390.906 P2.1 428.827,390.767 428.827,385.56 C11.1 ; C4.1 440.221,380.658 440.221,385.406 U2.3
M3.1: C5.1 C12.2 Designator27.2 P3.2 U3.1 | length 21.3
  Top Layer w1: C12.2 401.181,385.475 405.804,385.475 U3.1
  Bottom Layer w1: C12.2 401.014,385.412 401.014,390.704 P3.2 400.939,390.914 401.193,391.168 Designator27.2 ; U3.1 406.087,385.64 406.087,380.551 C5.1
M3.2: C6.1 C12.1 Designator26.2 P3.1 U3.3 | length 30.9
  Top Layer w1: C12.1 398.526,383.745 399.112,383.159 408.686,383.159 409.272,383.745 409.272,385.543 U3.3
  Bottom Layer w1: Designator26.2 P3.1 398.399,385.624 398.526,385.497 C12.1 ; U3.3 409.428,380.649 409.575,380.502 C6.1
M4.1: C7.1 C9.2 Designator25.2 P4.2 U4.1 | length 20.6
  Top Layer w1: C9.2 U4.1
  Bottom Layer w1: C9.2 371.169,385.497 371.169,390.831 P4.2 371.157,390.969 371.157,396.176 Designator25.2 ; C7.1 376.08,380.652 376.08,385.412 U4.1
M4.2: C8.1 C9.1 Designator24.2@368.554,396.24 P4.1 U4.3 | length 30
  Top Layer w1: C9.1 368.681,383.745 369.267,383.159 378.206,383.159 379.227,384.18 379.227,385.158 U4.3
  Bottom Layer w1: Designator24.2@368.554,396.24 P4.1 368.554,385.709 368.681,385.582 C9.1 ; C8.1 379.495,380.638 379.495,385.426 U4.3
mx0: 4067.112 Designator6.1 P10.1 R3.2 | length 38
  Top Layer w1: 4067.112 440.563,311.658 454.914,326.009 R3.2
  Bottom Layer w1: R3.2 459.041,326.072 459.041,330.01 Designator6.1 463.169,330.073 P10.1
mx1: 4067.105 Designator2.1 P14.1 R7.2 | length 35.3
  Top Layer w1: 4067.105 444.592,309.118 453.736,318.262 R7.2
  Bottom Layer w1: R7.2 Designator2.1 464.058,322.326 P14.1
mx2: 4067.104 Designator14.1 P18.1 R11.2 | length 33.3
  Top Layer w1: 4067.104 449.799,306.578 453.609,310.388 R11.2
  Bottom Layer w1: R11.2 Designator14.1 463.931,314.579 P18.1
mx3: 4067.103 Designator10.1 P22.1 R15.2 | length 32.9
  Top Layer w1: 4067.103 437.405,304.038 437.758,304.391 457.101,304.391 R15.2
  Bottom Layer w1: R15.2 Designator10.1 459.478,306.201 461.423,306.201 462.189,305.435 P22.1
mx4: 4067.102 Designator7.1 P9.1 R4.2 | length 36.5
  Top Layer w1: 4067.102 441.442,301.498 442.839,302.895 446.659,302.895 453.39,296.164 457.835,296.164 459.105,294.894 R4.2
  Bottom Layer w1: R4.2 Designator7.1 461.264,296.672 P9.1
mx5: 4067.101 Designator3.1 P13.1 R8.2 | length 36.8
  Top Layer w1: 4067.101 437.325,298.767 441.516,298.767 451.08,289.203 456.668,289.203 R8.2
  Bottom Layer w1: Designator3.1 R8.2 463.296,286.893 P13.1
mx6: 4067.100 Designator15.1 P17.1 R12.2 | length 39
  Top Layer w1: 4067.100 437.14,296.412 439.045,296.412 456.565,278.892 R12.2
  Bottom Layer w1: Designator15.1 R12.2 463.931,278.892 P17.1
mx7: 4067.99 Designator11.1 P21.1 R16.2 | length 45.4
  Top Layer w1: 4067.99 438.785,293.878 448.183,284.48 448.183,277.319 454.669,270.833 458.793,270.833 R16.2
  Bottom Layer w1: Designator11.1 R16.2 464.185,271.018 P21.1
mx8: 4067.98 Designator8.1 P8.1 R5.2 | length 45.6
  Top Layer w1: R5.2 403.602,270.76 409.067,276.225 409.067,282.321 420.491,293.745 421.761,293.745 4067.98
  Bottom Layer w1: P8.1 393.378,270.821 399.249,270.821 R5.2 399.299,270.771 399.299,274.559 Designator8.1
mx9: 4067.97 Designator4.1 P12.1 R9.2 | length 40.2
  Top Layer w1: R9.2 402.463,278.638 420.243,296.418 4067.97
  Bottom Layer w1: P12.1 398.138,279.517 399.017,278.638 R9.2 Designator4.1
mx10: 4067.111 Designator16.1 P16.1 R13.2 | length 38.2
  Top Layer w1: R13.2 402.226,286.762 408.199,292.735 412.115,292.735 418.338,298.958 4067.111
  Bottom Layer w1: P16.1 397.521,288.28 399.039,286.762 R13.2 399.299,286.773 399.299,290.561 Designator16.1
mx11: 4067.110 Designator12.1 P20.1 R17.2 | length 35.8
  Top Layer w1: R17.2 403.225,294.767 406.236,297.778 414.685,297.778 418.405,301.498 4067.110
  Bottom Layer w1: P20.1 394.721,298.446 Designator12.1 R17.2
mx12: 4067.109 Designator9.1 P7.1 R6.2 | length 33.6
  Top Layer w1: R6.2 400.964,304.165 421.767,304.165 4067.109
  Bottom Layer w1: P7.1 398.389,305.425 Designator9.1 399.299,306.313 399.299,302.521 R6.2
mx13: 4067.108 Designator5.1 P11.1 R10.2 | length 34.3
  Top Layer w1: R10.2 399.161,310.261 400.939,308.483 412.369,308.483 414.274,306.578 4067.108
  Bottom Layer w1: P11.1 393.321,314.064 399.031,314.064 Designator5.1 R10.2
mx14: 4067.107 Designator17.1 P15.1 R14.2 | length 36.9
  Top Layer w1: R14.2 399.352,318.071 399.352,317.324 400.319,316.357 407.924,316.357 415.163,309.118 4067.107
  Bottom Layer w1: P15.1 393.376,322.258 398.975,322.258 Designator17.1 R14.2
mx15: 4067.106 Designator13.1 P19.1 R18.2 | length 39.4
  Top Layer w1: R18.2 399.479,325.945 399.479,325.096 400.217,324.358 403.352,324.358 416.052,311.658 4067.106
  Bottom Layer w1: P19.1 398.272,330.962 Designator13.1 R18.2
N.C: 
N.O: 
NetD9_1: D9.1 R21.2 | length 3.4
  Bottom Layer w1: R21.2 D9.1
NetD10_1: D10.1 R22.2 | length 3.9
  Bottom Layer w1: R22.2 D10.1
NetD12_1: 
NetD12_2: 
NetD13_1: 
P.4U1: C2.2 U1.4 | length 42.4
  Bottom Layer w0.5: C2.2 470.408,376.086 470.115,375.793 465.074,375.793 464.185,376.682 464.185,396.455 464.478,396.748 471.766,396.748 472.059,396.455 U1.4
P.4U2: C4.2 U2.4 | length 43.7
  Bottom Layer w0.5: C4.2 440.182,375.578 439.889,375.285 434.467,375.285 433.959,375.793 433.959,396.455 434.252,396.748 441.325,396.748 441.96,396.113 U2.4
P.4U3: C6.2 U3.4 | length 40.2
  Bottom Layer w0.5: C6.2 409.511,377.952 408.373,376.813 404.237,376.813 403.225,377.825 403.225,395.224 405.765,397.764 410.425,397.764 411.128,397.061 U3.4
P.4U4: C8.2 U4.4 | length 43.9
  Bottom Layer w0.5: C8.2 379.476,375.617 378.89,375.031 373.966,375.031 373.253,375.744 373.253,394.97 375.539,397.256 380.921,397.256 381.214,396.963 U4.4
P.8U1: C1.2 U1.8 | length 26.8
  Bottom Layer w0.5: C1.2 466.916,377.952 464.947,379.921 464.947,386.999 465.679,387.731 478.566,387.731 478.859,388.024 U1.8
P.8U2: C3.2 U2.8 | length 26.7
  Bottom Layer w0.5: C3.2 436.816,378.079 434.975,379.921 434.975,388.073 435.268,388.366 448.467,388.366 448.76,388.659 U2.8
P.8U3: C5.2 U3.8 | length 27.1
  Bottom Layer w0.5: C5.2 406.082,377.952 404.114,379.921 404.114,388.327 404.407,388.62 417.576,388.62 417.928,388.972 U3.8
P.8U4: C7.2 U4.8 | length 26.2
  Bottom Layer w0.5: C7.2 375.983,378.079 374.257,379.805 374.257,387.154 374.961,387.858 387.428,387.858 388.014,388.444 U4.8
PA8: D15.1 STM32.29 | length 21
  Top Layer w1: STM32.29 442.976,357.3 443.816,358.14 449.077,358.14 451.297,360.36 451.297,364.932 D15.1
PA11: Designator20.1 STM32.32 | length 11.2
  Bottom Layer w1: STM32.32 435.415,353.949 437.169,355.703 437.999,355.703 442.726,360.43 443.488,360.43 Designator20.1
PA12: Designator18.4 STM32.33 | length 9.9
  Bottom Layer w1: STM32.33 432.875,353.949 434.629,355.703 434.951,355.703 Designator18.4
PA15: Designator18.3 STM32.38 | length 9.9
  Bottom Layer w1: STM32.38 430.335,353.949 432.24,355.854 432.562,355.854 Designator18.3
PB3: Designator18.2 STM32.39 | length 10.3
  Bottom Layer w1: STM32.39 427.736,354.22 428.186,354.67 428.186,355.034 430.527,357.375 431.569,357.375 434.848,360.654 Designator18.2
PB4: Designator18.1 STM32.40 | length 10.7
  Bottom Layer w1: STM32.40 425.265,354.018 425.265,355.415 427.99,358.14 429.223,358.14 431.513,360.43 432.058,360.43 Designator18.1
PWML1: STM32.46 U4.7 | length 52.9
  Bottom Layer w1: U4.7 386.314,372.13 400.304,358.14 400.304,354.33 403.479,351.155 411.91,351.155 412.496,351.741 STM32.46
PWML2: STM32.45 U3.5 | length 32.7
  Top Layer w1: U3.5 412.833,385.694 412.833,381.552 415.036,379.349 STM32.45
PWMR1: STM32.42 U1.5 | length 81.5
  Top Layer w1: STM32.42 420.116,369.189 421.14,370.213 423.231,370.213 424.493,371.475 v1(446.151,371.475) ; v1(456.184,372.999) 457.962,374.777 473.173,374.777 473.759,375.363 U1.5
  Bottom Layer w1: v1(446.151,371.475) 454.66,371.475 v1(456.184,372.999)
PWMR2: STM32.43 U2.5 | length 54
  Top Layer w1: STM32.43 417.576,369.443 423.164,375.031 443.074,375.031 443.66,375.617 U2.5
R: STM32.7
RX: P5.2 R1.1 STM32.30 | length 51.3
  Top Layer w1: STM32.30 442.849,351.536 455.885,351.536 458.109,353.761 458.155,353.761 464.439,360.045 P5.2
  Bottom Layer w1: P5.2 464.439,357.71 465.025,357.124 471.696,357.124 R1.1
RX1: R1.2 U6.2 | length 24.1
  Bottom Layer w1: U6.2 485.902,343.281 487.094,343.281 487.68,343.867 487.68,351.966 487.094,352.552 R1.2
SCL: IDC1.5 P6.3 R2_1.2 STM32.21 U7.3 | length 51.9
  Bottom Layer w1: P6.3 430.534,327.537 430.534,329.995 430.539,330 430.539,333.941 431.37,334.772 439.42,334.772 440.245,335.597 440.245,337.502 STM32.21 440.436,340.233 445.516,345.313 465.385,345.313 465.575,345.503 466.28,345.503 IDC1.5 ; R2_1.2 461.518,345.108
SDA: IDC1.9 P6.4 R1_1.2 STM32.22 U7.4 | length 48
  Bottom Layer w1: P6.4 433.074,327.537 433.074,329.995 433.079,330 432.943,330.136 432.943,332.916 433.529,333.502 442.39,333.502 442.976,334.088 STM32.22 443.152,337.869 443.152,339.819 443.738,340.405 459.232,340.405 ; R1_1.2 459.232,340.405 ; IDC1.9 466.28,340.423 465.573,340.423 465.555,340.405 459.232,340.405
SET1: Designator1.1@429.387,365.252 Designator1.2@429.387,360.807 R20.1 STM32.41 | length 19.6
  Bottom Layer w1: STM32.41 422.656,357.251 426.212,360.807 429.387,360.807 429.387,365.252 429.768,365.633 429.768,367.92 430.128,368.28 R20.1
SET2: 
sh1: P24.1 STM32.11 | length 53.4
  Bottom Layer w0.5: P24.1 376.174,334.137 376.174,339.09 378.206,341.122 405.347,341.122 406.236,340.233 416.687,340.233 417.576,339.344 STM32.11
sh2: P26.1 STM32.12 | length 68.6
  Bottom Layer w0.5: P26.1 375.793,324.104 374.904,324.993 374.904,339.725 377.063,341.884 419.1,341.884 420.082,340.902 420.082,337.727 STM32.12
sh3: P28.1 STM32.13 | length 81.8
  Bottom Layer w0.5: P28.1 374.943,316.611 374.65,316.904 374.65,317.119 373.888,317.881 373.888,340.106 376.555,342.773 421.005,342.773 422.656,341.122 STM32.13
SHOOT: Designator24.4 STM32.2 | length 10.9
  Bottom Layer w1: Designator24.4 402.903,338.201 404.149,339.447 405.603,339.447 407.357,337.693 STM32.2
TSHOOT: 
TX: P5.3 R2.1 STM32.31 | length 54.4
  Top Layer w1: STM32.31 437.896,351.409 439.547,349.758 456.184,349.758 457.601,351.175 457.601,351.479 458.629,352.507 458.933,352.507 466.979,360.553 P5.3
  Bottom Layer w1: P5.3 466.979,359.742 467.819,358.902 472.458,358.902 R2.1
TX1: R2.2 U6.3 | length 28.5
  Bottom Layer w1: U6.3 486.41,341.249 488.745,341.249 489.331,341.835 489.331,354.506 488.745,355.092 R2.2
V1: *1.2 M1.1 S2-5V.1 | length 67.5
  Top Layer w2: M1.1 409.512,262.157 410.684,260.985 434.057,260.985 435.229,259.813 *1.2
  Bottom Layer w2: *1.2 435.079,255.547 435.079,255.897 434.836,256.14 434.836,258.404 436.008,259.576 S2-5V.1
VBATT: STM32.1
VCC: 4067.114 *1.6 C27.1 C28.1 Designator1.1@422.402,365.252 Designator1.2@422.402,360.807 Designator20.2 Designator24.2@392.684,338.201 IDC1.2 M1.4 P5.4 P6.2 P7.3 P8.3 P9.3 P10.3 P11.3 P12.3 P13.3 P14.3 P15.3 P16.3 P17.3 P18.3 P19.3 P20.3 P21.3 P22.3 P23.3 P24.3 P25.3 P26.3 P27.3 P28.3 P29.3 R1_1.1 R2_1.1 R3.1 R4.1 R5.1 R6.1 R7.1 R8.1 R9.1 R10.1 R11.1 R12.1 R13.1 R14.1 R15.1 R16.1 R17.1 R18.1 R22.1 STM32.5V U1.11 U2.11 U3.11 U4.11 U6.1 U7.2 | length 788.6
  Top Layer w1: P19.3 388.208,331.058 388.208,333.698 392.684,338.175 392.684,338.201 396.367,341.884 396.367,357.675 396.953,358.261 408.438,358.261 409.956,356.743 STM32.5V ; P8.3 390.128,268.991 392.165,266.954 403.352,266.954 R5.1 407.035,270.891 411.861,275.717 411.861,281.305 4067.114 ; IDC1.2 469.011,351.045 469.519,351.553 P5.4
  Bottom Layer w1: P29.3 P27.3 P25.3 P23.3 ; P23.3 P28.3 383.857,316.674 383.857,324.041 P26.3 383.857,324.167 383.857,331.406 P24.3 387.469,331.47 387.977,330.962 P19.3 P15.3 ; P16.3@388.015,288.184 P16.3 ; P15.3@388.015,321.975 388.015,322.347 P15.3 P11.3 P7.3 P20.3 P16.3 ; P8.3 P12.3 388.174,279.581 388.174,288.217 P16.3 ; U4.11 393.114,372.188 408.749,356.553 412.559,356.553 ; R5.1 R13.1 407.024,286.65 407.024,294.633 R17.1 407.024,294.654 407.024,302.376 R6.1 406.961,302.461 406.961,310.19 R10.1 R14.1 406.95,318.202 406.95,325.949 R18.1 407.014,332.465 408.178,333.629 427.355,333.629 427.999,332.985 427.999,330 427.994,329.995 427.994,327.537 P6.2 ; STM32.5V 412.559,356.553 ; U3.11 423.028,381.1 428.52,374.247 428.625,374.142 428.625,371.475 422.402,365.252 422.402,360.807 418.846,357.251 413.258,357.251 412.559,356.553 ; Designator20.2 446.327,360.631 446.327,358.853 446.913,358.267 451.993,358.267 459.359,365.633 472.618,365.633 481.292,374.307 ; R16.1 R12.1 R8.1 451.316,287.08 451.316,294.7 R4.1 451.316,294.827 451.316,302.574 R15.1 R11.1 451.316,310.575 451.316,318.322 R7.1 R3.1 ; U2.11 453.86,380.217 459.77,374.307 481.292,374.307 ; R1_1.1 R2_1.1 461.711,350.822 461.711,353.253 463.423,354.965 468.679,354.965 469.265,354.379 469.265,353.299 469.202,353.236 469.202,350.965 IDC1.2 472.567,350.774 474.472,348.869 474.472,336.391 476.282,336.391 U6.1 471.52,331.439 469.615,331.439 P10.3 P14.3 P18.3 P22.3 P9.3 P13.3 P17.3 P21.3 ; 469.362,365.44 469.519,365.283 P5.4 ; U1.11 483.959,376.974 481.292,374.307
  Bottom Layer w2: R5.1 405.384,268.986 405.384,266.118 408.314,263.188 424.898,263.188 425.069,263.017 ; *1.6 425.069,263.017 ; M1.4@450.008,266.763 465.518,266.763 469.265,263.017 469.265,254.787 R22.1 480.441,258.59 C27.1 480.441,270.764 ; R16.1 450.338,271.141 449.106,269.909 449.106,266.861 M1.4 427.799,266.763 425.069,264.033 425.069,263.017 ; P21.3 480.441,270.764 ; C28.1 480.441,270.764
VS: C25.1 C26.1 C30.1 C31.1 C32.1 C33.1 Designator24.1@390.144,338.201 R21.1 S1-12V.1 U1.2 U2.2 U3.2 U4.2 | length 435.9
  Top Layer w1: v1(390.017,348.361) 390.017,348.288 390.144,348.161 Designator24.1@390.144,338.201
  Top Layer w2: C30.1 358.093,403.334 359.265,404.506 377.814,404.506 ; U4.2 377.814,404.506 ; U3.2 407.728,403.686 406.908,404.506 ; U2.2 438.56,404.223 438.277,404.506 ; U1.2 468.659,403.334 467.487,404.506 ; C33.1 490.173,403.334 489.001,404.506 467.487,404.506 ; 377.814,404.506 406.908,404.506 ; 406.908,404.506 438.277,404.506 ; 438.277,404.506 467.487,404.506
  Bottom Layer w2: C30.1 C31.1 358.093,384.476 369.443,373.126 378.714,373.126 395.478,356.362 395.478,352.933 390.906,348.361 v1(390.017,348.361) 373.048,348.361 368.284,343.598 368.284,289.703 373.38,284.607 373.38,276.987 C25.1 373.634,265.096 C26.1 373.587,259.381 381.614,251.354 R21.1 389.509,254.526 389.509,258.058 390.681,259.229 395.472,259.229 S1-12V.1 ; C33.1 490.22,398.479 C32.1
VShoot: 
VSS: D11.1 S2-5V.3 | length 9.7
  Bottom Layer w2: D11.1 454.846,255.922 457.53,253.237 462.203,253.237 S2-5V.3
VSS1: D11.2 P30.2 P32.2 S1-12V.3 | length 68.6
  Top Layer w2: S1-12V.3 397.043,251.214 397.043,248.244 399.288,245.999 422.5,245.999 424.053,244.446 P32.2
  Bottom Layer w2: P32.2 424.053,244.795 425.225,245.967 433.578,245.967 ; P30.2 433.578,245.967 ; D11.2 454.54,245.902 454.133,245.902 454.068,245.967 433.578,245.967
pads on no net: *1.3 *1.5 *1.8 IDC1.1 IDC1.3 IDC1.4 IDC1.7 M1.0 P5.1 P5.5 P6.9 STM32.3.3V U1.0 U2.0 U3.0 U4.0 U6.5 U6.6 U6.7 U6.8 U7.139 U7.140 U7.141 U7.142

## Silkscreen, mask and mechanical layers (free items; w line width, h text height)
Top Overlay:
  rectangle: 449.961,342.646 458.089,348.742
  lines w0.5: 396.875,341.376 407.289,341.376 ; 396.875,344.17 407.416,344.17 ; 397.002,347.472 407.416,347.472 ; 397.002,350.393 407.416,350.393 ; 406.019,339.598 408.559,339.598 408.559,352.044 406.019,352.044 406.019,339.598
Mechanical 1:
  circle w0.254: c459.994,378.968 r2.7
  circle w0.254: c429.641,378.968 r2.7
  circle w0.254: c458.47,410.718 r2.7
  circle w0.254: c399.923,410.718 r2.7
  circle w0.254: c476.626,431.936 r1.75
  circle w0.254: c378.926,432.266 r1.75
  circle w0.254: c478.295,250.131 r1.75
  circle w0.254: c377.463,250.077 r1.75
  lines w0.254: 363.283,412.115 393.319,412.115 393.573,412.369 393.573,414.02 383.114,424.479 ccw(c377.249,411.8) 363.283,412.136 ; 366.861,266.437 cw(c419.062,339.752) 353.06,400.939 353.06,382.016 363.728,371.348 378.46,371.348 393.573,356.235 393.573,353.06 390.271,349.758 372.491,349.758 366.903,344.17 366.903,266.446 ; 385.292,440.075 ccw(c427.727,341.305) 470.451,439.951 470.42,439.92 470.42,426.99 ; 385.292,440.088 385.292,427.228 ccw(c428.02,482.674) 470.438,426.99 ; 491.236,267.589 491.236,282.575 488.95,284.861 474.345,284.861 473.329,285.877 473.329,330.2 475.615,332.486 488.569,332.486 490.474,334.391 490.474,357.378 488.696,359.156 478.155,359.156 477.266,360.045 477.266,367.919 489.839,380.492 499.872,380.492 500.634,381.254 500.634,401.828 cw(c436.32,338.87) 491.24,267.568 ; 492.316,412.115 462.28,412.115 462.026,412.369 462.026,414.02 472.485,424.479 cw(c478.35,411.8) 492.316,412.136 ; 394.335,372.618 394.335,380.619 395.097,381.381 401.701,381.381 402.463,380.619 402.463,376.682 403.479,375.666 413.258,375.666 413.258,359.156 413.131,359.029 407.924,359.029 394.335,372.618 ; 413.639,270.764 414.147,270.256 446.278,270.256 446.786,270.764 446.786,283.21 441.579,288.417 421.132,288.417 413.639,280.924 413.639,270.764 ; 431.546,364.363 431.927,363.982 446.024,363.982 446.405,364.363 446.405,369.57 445.897,370.078 431.927,370.078 431.546,369.697 431.546,364.363 ; 459.105,367.03 472.44,367.03 472.44,371.983 459.105,371.983 459.105,367.03
Mechanical 13:
  lines w0.254: 378.333,335.153 378.333,339.344 378.841,339.852 387.731,339.852 388.239,339.344 388.239,335.153 387.731,334.645 378.841,334.645 378.333,335.153

## Text inside footprints (layer, text, board x,y; h text height)
*1: Top Overlay "+Vo" at 426.031,258.005 h0.76 r180; Top Overlay "CS" at 420.502,258.005 h0.76 r180; Top Overlay "0V" at 422.968,258.005 h0.76 r180; Top Overlay "GND" at 438.607,258.005 h0.76 r180; Top Overlay "Vin" at 435.8,258.005 h0.76 r180; Top Overlay "Ctrl" at 433.14,261.157 h0.76 r180; Top Overlay "NC" at 428.193,258.005 h0.76 r180
IDC1: Top Overlay "2" at 468.261,353.482 h0.8 r270; Top Overlay "1" at 465.721,352.982 h0.8 r270; Top Overlay "10" at 468.261,338.906 h0.8 r270; Top Overlay "9" at 465.721,338.906 h0.8 r270
M1: Top Overlay "_" at 410.56,254.341 h2 r270; Top Overlay "+" at 409.977,260.972 h2; Top Overlay "IN" at 409.81,258.816 h2 r270; Top Overlay "OUT" at 447.585,259.766 h2 r270; Top Overlay "_" at 447.935,254.266 h2 r90; Top Overlay "+" at 447.938,260.972 h2
U1: Top Overlay "11" at 483.079,386.461 h1.5; Top Overlay "1" at 466.95,386.969 h1.5
U2: Top Overlay "11" at 452.98,386.461 h1.5; Top Overlay "1" at 436.851,386.969 h1.5
U3: Top Overlay "1" at 406.019,387.223 h1.5; Top Overlay "11" at 422.148,386.715 h1.5
U4: Top Overlay "1" at 376.105,386.969 h1.5; Top Overlay "11" at 392.234,386.461 h1.5